# Altium PCB MATX.pcbdoc
Units mm, origin at the board's own origin, x right, y up, seen from the top; angles counter-clockwise.
Board outline 243.84 x 243.84 mm, 2 copper layers (Top Layer, Bottom Layer), stack 1.58 mm thick; 4 components, 0 nets, 674 pads, 0 vias.
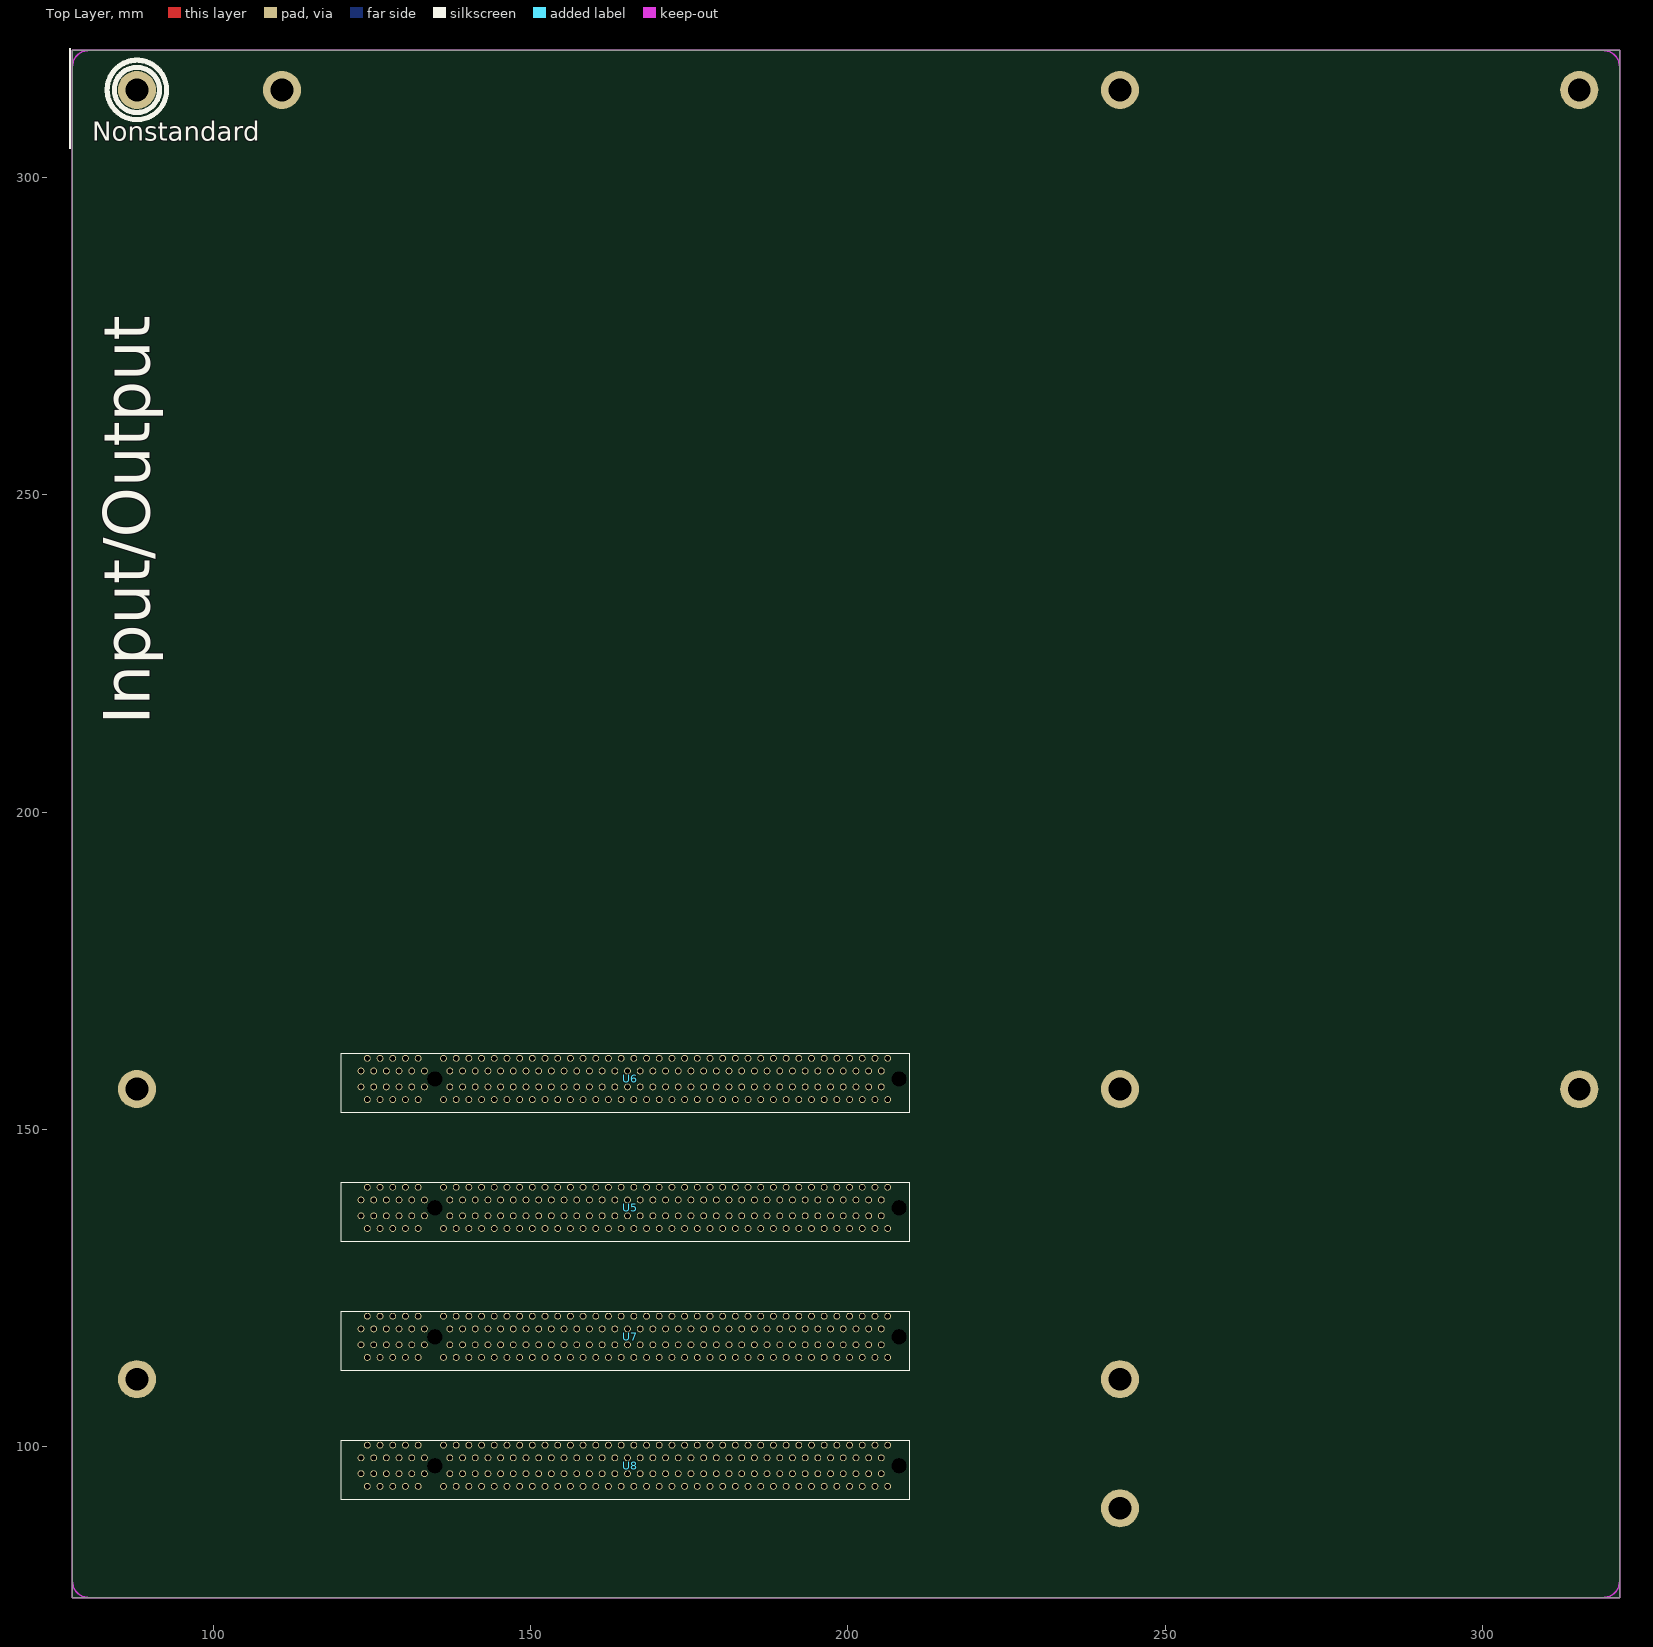
[diagram p0: Top Layer view]
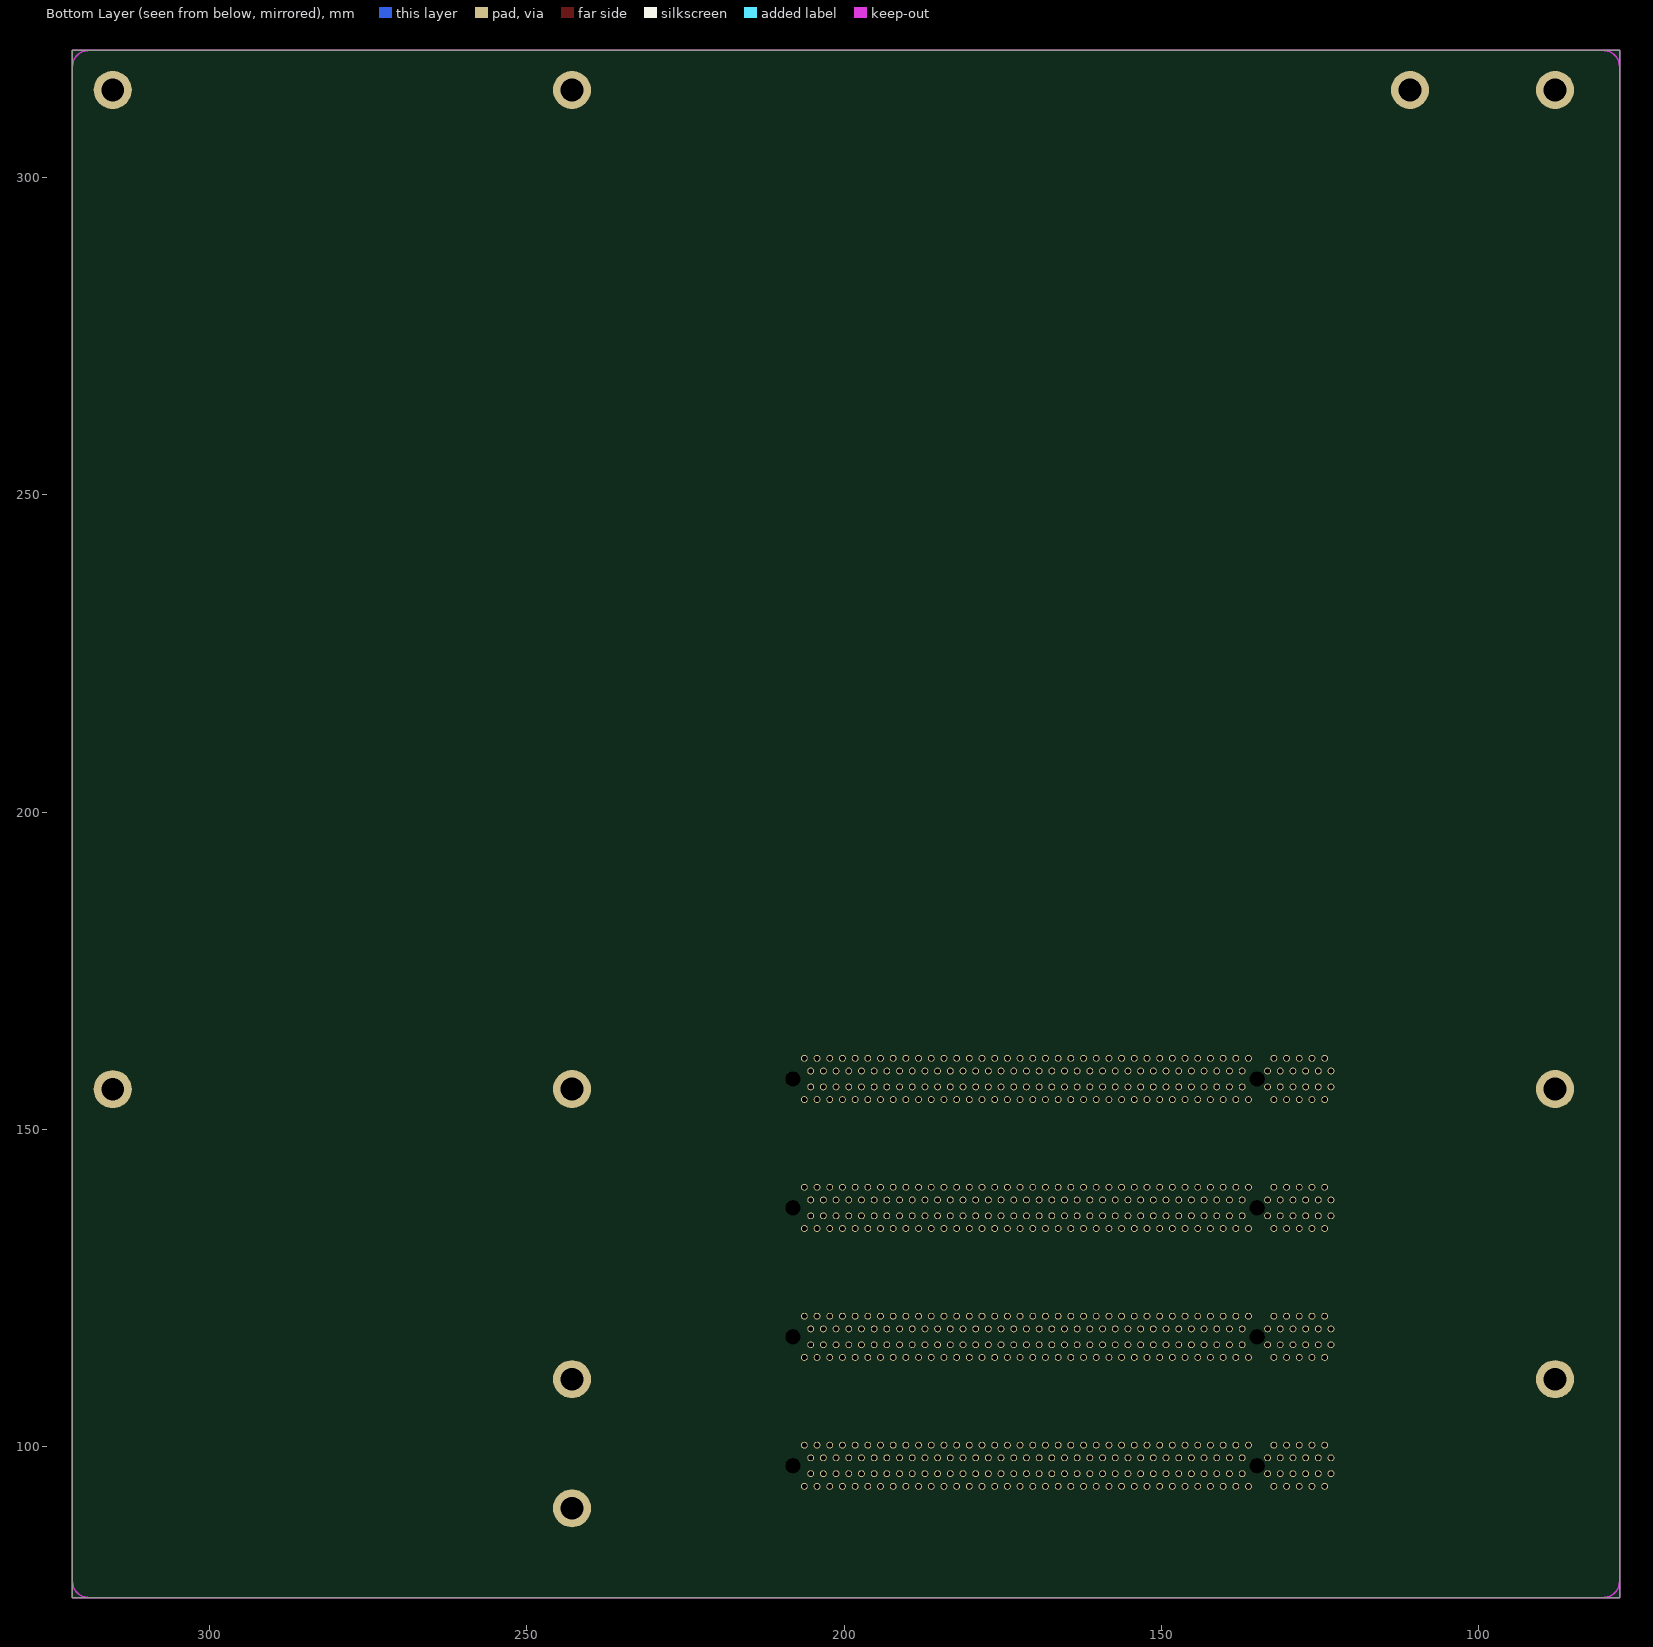
[diagram p1: Bottom Layer view, seen from below]

## Layer stack, top to bottom
Top Solder Mask Layer: solder mask 0.0102, Dk 3.3
Top Layer: signal copper 0.0356
Dielectric1: surface 1.5088, FR4, Dk 4.5
Bottom Layer: signal copper 0.0356
Bottom Solder Mask Layer: solder mask 0.0102, Dk 3.3

## Board outline
77.782,320.04 77.782,76.2 321.622,76.2 321.622,320.04

## Design rules (kind name [scope] priority, off if disabled: settings)
BoardOutlineClearance copperThickness1oz [All] p0: genericclearance=0.254 ignorepadtopadclearanceinfootprint=FALSE except(0: Arc-SplitContinuation Track-SplitContinuation SMDPad-SplitContinuation THPad-SplitContinuation Via-SplitContinuation Fill-SplitContinuation Poly-SplitContinuation Region-SplitContinuation Text-SplitContinuation)
BoardOutlineClearance copperThickness2oz [All] p0: genericclearance=0.254 ignorepadtopadclearanceinfootprint=FALSE except(0: Arc-SplitContinuation Track-SplitContinuation SMDPad-SplitContinuation THPad-SplitContinuation Via-SplitContinuation Fill-SplitContinuation Poly-SplitContinuation Region-SplitContinuation Text-SplitContinuation)
BoardOutlineClearance Plane_innerPlane [All] p0: genericclearance=0.254 ignorepadtopadclearanceinfootprint=FALSE except(0: Arc-SplitContinuation Track-SplitContinuation SMDPad-SplitContinuation THPad-SplitContinuation Via-SplitContinuation Fill-SplitContinuation Poly-SplitContinuation Region-SplitContinuation Text-SplitContinuation)
BoardOutlineClearance Copper_copperRegion [All] p0: genericclearance=0.254 ignorepadtopadclearanceinfootprint=FALSE except(0: Arc-SplitContinuation Track-SplitContinuation SMDPad-SplitContinuation THPad-SplitContinuation Via-SplitContinuation Fill-SplitContinuation Poly-SplitContinuation Region-SplitContinuation Text-SplitContinuation)
BoardOutlineClearance otherClearance [All] p0: genericclearance=0.254 ignorepadtopadclearanceinfootprint=FALSE except(0: Arc-SplitContinuation Track-SplitContinuation SMDPad-SplitContinuation THPad-SplitContinuation Via-SplitContinuation Fill-SplitContinuation Poly-SplitContinuation Region-SplitContinuation Text-SplitContinuation)
Clearance copperThickness1oz [All] p1: gap=0.178 ignorepadtopadclearanceinfootprint=FALSE
Clearance copperThickness2oz [All] p1: gap=0.178 ignorepadtopadclearanceinfootprint=FALSE
Clearance Plane_innerPlane [All] p1: gap=0.178 ignorepadtopadclearanceinfootprint=FALSE
Clearance Copper_copperRegion [All] p1: gap=0.178 ignorepadtopadclearanceinfootprint=FALSE
Clearance otherClearance [All] p1: gap=0.178 ignorepadtopadclearanceinfootprint=FALSE
DiffPairsRouting differentialPair [All] p1: maxuncoupledlength=10 minlimit=6 maxlimit=Infinity mostfreqgap=6 toplayer_minwidth=5 toplayer_prefwidth=10 toplayer_maxwidth=100 bottomlayer_minwidth=5 bottomlayer_prefwidth=10 bottomlayer_maxwidth=100
PasteMaskExpansion pasteMaskExpansion [All] p1: expansion=0
PlaneConnect innerPlane [All] p1: planeconnectstyle=Relief reliefexpansion=0.508 reliefentries=4 reliefconductorwidth=0.254 reliefairgap=0.254
PolygonConnect copperRegion [All] p1: connectstyle=Relief reliefentries=4 reliefconductorwidth=10 polygonreliefangle="90 Angle" airgapwidth=10
RoutingVias viaSize [All] p1: viastyle="Through Hole" holewidth=12.0078 minholewidth=11.811 maxholewidth=248.0314 width=12.0078 minwidth=11.811 maxwidth=248.0314
SolderMaskExpansion solderMaskExpansion [IsVia] p1: useseparateexpansions=TRUE expansion=-1000 expansionbottom=-1000
SolderMaskExpansion solderMaskExpansion [All] p2: useseparateexpansions=TRUE expansion=2 expansionbottom=2
Width copperThickness1oz [All] p1: maxlimit=100 minlimit=5 preferedwidth=10
Width copperThickness2oz [All] p1: maxlimit=100 minlimit=8 preferedwidth=10

## Components (designator, comment, footprint, x,y, rotation, side; value= is the part's Value field where it differs from the comment)
U5 "PCIEX16_SOLT COPY" "PCIEX16_SOLT COPY"#1 157.208,134.236 r0 top
U6 "PCIEX16_SOLT COPY" "PCIEX16_SOLT COPY"#2 157.208,154.556 r0 top
U7 "PCIEX16_SOLT COPY" "PCIEX16_SOLT COPY"#1 157.208,113.916 r0 top
U8 "PCIEX16_SOLT COPY" "PCIEX16_SOLT COPY"#1 157.208,93.596 r0 top

## Footprints (in the part's own frame and the unit in brackets; to place one, negate y for a bottom-side part, rotate by r counter-clockwise, add the part's x,y. Pads: shape width x height; smd on the part's side, far side on the other; paste and mask are expansions set on the pad)
"PCIEX16_SOLT COPY"#1 [mil]
  round 42 hole 28 slot 28.2 at 0 deg paste+0 mask+4: A1(-1336.3,182.2) A2(-1297,261) A3(-1257.6,182.2) A4(-1218.2,261) A5(-1178.9,182.2) A6(-1139.5,261) A7(-1100.1,182.2) A8(-1060.8,261) A9(-1021.4,182.2) A10(-982,261) A11(-942.6,182.2) A12(-824.5,261) A13(-785.2,182.2) A14(-745.8,261) A15(-706.4,182.2) A16(-667.1,261) A17(-627.7,182.2) A18(-588.3,261) A19(-548.9,182.2) A20(-509.6,261) A21(-470.2,182.2) A22(-430.8,261) A23(-391.5,182.2) A24(-352.1,261) A25(-312.7,182.2) A26(-273.4,261) A27(-234,182.2) A28(-194.6,261) A29(-155.2,182.2) A30(-115.9,261) A31(-76.5,182.2) A32(-37.1,261) A33(2.2,182.2) A34(41.6,261) A35(81,182.2) A36(120.3,261) A37(159.7,182.2) A38(199.1,261) A39(238.5,182.2) A40(277.8,261) A41(317.2,182.2) A42(356.6,261) A43(395.9,182.2) A44(435.3,261) A45(474.7,182.2) A46(514,261) A47(553.4,182.2) A48(592.8,261) A49(632.2,182.2) A50(671.5,261) A51(710.9,182.2) A52(750.3,261) A53(789.6,182.2) A54(829,261) A55(868.4,182.2) A56(907.7,261) A57(947.1,182.2) A58(986.5,261) A59(1025.9,182.2) A60(1065.2,261) A61(1104.6,182.2) A62(1144,261) A63(1183.3,182.2) A64(1222.7,261) A65(1262.1,182.2) A66(1301.4,261) A67(1340.8,182.2) A68(1380.2,261) A69(1419.6,182.2) A70(1458.9,261) A71(1498.3,182.2) A72(1537.7,261) A73(1577,182.2) A74(1616.4,261) A75(1655.8,182.2) A76(1695.1,261) A77(1734.5,182.2) A78(1773.9,261) A79(1813.3,182.2) A80(1852.6,261) A81(1892,182.2) A82(1931.4,261) B1(-1336.3,83.8) B2(-1297,5.1) B3(-1257.6,83.8) B4(-1218.2,5.1) B5(-1178.9,83.8) B6(-1139.5,5.1) B7(-1100.1,83.8) B8(-1060.8,5.1) B9(-1021.4,83.8) B10(-982,5.1) B11(-942.6,83.8) B12(-824.5,5.1) B13(-785.2,83.8) B14(-745.8,5.1) B15(-706.4,83.8) B16(-667.1,5.1) B17(-627.7,83.8) B18(-588.3,5.1) B19(-548.9,83.8) B20(-509.6,5.1) B21(-470.2,83.8) B22(-430.8,5.1) B23(-391.5,83.8) B24(-352.1,5.1) B25(-312.7,83.8) B26(-273.4,5.1) B27(-234,83.8) B28(-194.6,5.1) B29(-155.2,83.8) B30(-115.9,5.1) B31(-76.5,83.8) B32(-37.1,5.1) B33(2.2,83.8) B34(41.6,5.1) B35(81,83.8) B36(120.3,5.1) B37(159.7,83.8) B38(199.1,5.1) B39(238.5,83.8) B40(277.8,5.1) B41(317.2,83.8) B42(356.6,5.1) B43(395.9,83.8) B44(435.3,5.1) B45(474.7,83.8) B46(514,5.1) B47(553.4,83.8) B48(592.8,5.1) B49(632.2,83.8) B50(671.5,5.1) B51(710.9,83.8) B52(750.3,5.1) B53(789.6,83.8) B54(829,5.1) B55(868.4,83.8) B56(907.7,5.1) B57(947.1,83.8) B58(986.5,5.1) B59(1025.9,83.8) B60(1065.2,5.1) B61(1104.6,83.8) B62(1144,5.1) B63(1183.3,83.8) B64(1222.7,5.1) B65(1262.1,83.8) B66(1301.4,5.1) B67(1340.8,83.8) B68(1380.2,5.1) B69(1419.6,83.8) B70(1458.9,5.1) B71(1498.3,83.8) B72(1537.7,5.1) B73(1577,83.8) B74(1616.4,5.1) B75(1655.8,83.8) B76(1695.1,5.1) B77(1734.5,83.8) B78(1773.9,5.1) B79(1813.3,83.8) B80(1852.6,5.1) B81(1892,83.8) B82(1931.4,5.1)
  round 10 hole 93 slot 93.2 at 0 deg unplated paste+0 mask+4: NP1(-877.7,133) NP2(2002.2,133)
  silkscreen extent -1459,-78 2065,292
"PCIEX16_SOLT COPY"#2 [mil]
  round 42 hole 28 slot 28.2 at 0 deg paste+0 mask+4: A1(-1336.3,182.3) A2(-1297,261) A3(-1257.6,182.3) A4(-1218.2,261) A5(-1178.9,182.3) A6(-1139.5,261) A7(-1100.1,182.3) A8(-1060.8,261) A9(-1021.4,182.3) A10(-982,261) A11(-942.6,182.3) A12(-824.5,261) A13(-785.2,182.3) A14(-745.8,261) A15(-706.4,182.3) A16(-667.1,261) A17(-627.7,182.3) A18(-588.3,261) A19(-548.9,182.3) A20(-509.6,261) A21(-470.2,182.3) A22(-430.8,261) A23(-391.5,182.3) A24(-352.1,261) A25(-312.7,182.3) A26(-273.4,261) A27(-234,182.3) A28(-194.6,261) A29(-155.2,182.3) A30(-115.9,261) A31(-76.5,182.3) A32(-37.1,261) A33(2.2,182.3) A34(41.6,261) A35(81,182.3) A36(120.3,261) A37(159.7,182.3) A38(199.1,261) A39(238.5,182.3) A40(277.8,261) A41(317.2,182.3) A42(356.6,261) A43(395.9,182.3) A44(435.3,261) A45(474.7,182.3) A46(514,261) A47(553.4,182.3) A48(592.8,261) A49(632.2,182.3) A50(671.5,261) A51(710.9,182.3) A52(750.3,261) A53(789.6,182.3) A54(829,261) A55(868.4,182.3) A56(907.7,261) A57(947.1,182.3) A58(986.5,261) A59(1025.9,182.3) A60(1065.2,261) A61(1104.6,182.3) A62(1144,261) A63(1183.3,182.3) A64(1222.7,261) A65(1262.1,182.3) A66(1301.4,261) A67(1340.8,182.3) A68(1380.2,261) A69(1419.6,182.3) A70(1458.9,261) A71(1498.3,182.3) A72(1537.7,261) A73(1577,182.3) A74(1616.4,261) A75(1655.8,182.3) A76(1695.1,261) A77(1734.5,182.3) A78(1773.9,261) A79(1813.3,182.3) A80(1852.6,261) A81(1892,182.3) A82(1931.4,261) B1(-1336.3,83.8) B2(-1297,5.1) B3(-1257.6,83.8) B4(-1218.2,5.1) B5(-1178.9,83.8) B6(-1139.5,5.1) B7(-1100.1,83.8) B8(-1060.8,5.1) B9(-1021.4,83.8) B10(-982,5.1) B11(-942.6,83.8) B12(-824.5,5.1) B13(-785.2,83.8) B14(-745.8,5.1) B15(-706.4,83.8) B16(-667.1,5.1) B17(-627.7,83.8) B18(-588.3,5.1) B19(-548.9,83.8) B20(-509.6,5.1) B21(-470.2,83.8) B22(-430.8,5.1) B23(-391.5,83.8) B24(-352.1,5.1) B25(-312.7,83.8) B26(-273.4,5.1) B27(-234,83.8) B28(-194.6,5.1) B29(-155.2,83.8) B30(-115.9,5.1) B31(-76.5,83.8) B32(-37.1,5.1) B33(2.2,83.8) B34(41.6,5.1) B35(81,83.8) B36(120.3,5.1) B37(159.7,83.8) B38(199.1,5.1) B39(238.5,83.8) B40(277.8,5.1) B41(317.2,83.8) B42(356.6,5.1) B43(395.9,83.8) B44(435.3,5.1) B45(474.7,83.8) B46(514,5.1) B47(553.4,83.8) B48(592.8,5.1) B49(632.2,83.8) B50(671.5,5.1) B51(710.9,83.8) B52(750.3,5.1) B53(789.6,83.8) B54(829,5.1) B55(868.4,83.8) B56(907.7,5.1) B57(947.1,83.8) B58(986.5,5.1) B59(1025.9,83.8) B60(1065.2,5.1) B61(1104.6,83.8) B62(1144,5.1) B63(1183.3,83.8) B64(1222.7,5.1) B65(1262.1,83.8) B66(1301.4,5.1) B67(1340.8,83.8) B68(1380.2,5.1) B69(1419.6,83.8) B70(1458.9,5.1) B71(1498.3,83.8) B72(1537.7,5.1) B73(1577,83.8) B74(1616.4,5.1) B75(1655.8,83.8) B76(1695.1,5.1) B77(1734.5,83.8) B78(1773.9,5.1) B79(1813.3,83.8) B80(1852.6,5.1) B81(1892,83.8) B82(1931.4,5.1)
  round 10 hole 93 slot 93.2 at 0 deg unplated paste+0 mask+4: NP1(-877.7,133) NP2(2002.2,133)
  silkscreen extent -1459,-78 2065,292

## Free pads (board coordinates)
  round 5.999 hole 3.599 paste+0 mask+0.051: 89(87.942,110.617) 89(87.942,156.337) 89(87.942,313.817) 89(110.802,313.817) 89(242.882,90.269) 89(242.882,110.617) 89(242.882,156.337) 89(242.882,313.817) 89(315.272,156.327) 89(315.272,313.817)

## Nets (pads, with @x,y where several pads share a name; then routed paths per layer and width w, separated by ;. In a path a pad name is that pad's centre, name@x,y a point inside that pad or via, vN(x,y) a via of type N, cw(c..) or ccw(c..) an arc to the next point about the centre after c; other vN are vias at no path point)
pads on no net: U5.A1 U5.A2 U5.A3 U5.A4 U5.A5 U5.A6 U5.A7 U5.A8 U5.A9 U5.A10 U5.A11 U5.A12 U5.A13 U5.A14 U5.A15 U5.A16 U5.A17 U5.A18 U5.A19 U5.A20 U5.A21 U5.A22 U5.A23 U5.A24 U5.A25 U5.A26 U5.A27 U5.A28 U5.A29 U5.A30 U5.A31 U5.A32 U5.A33 U5.A34 U5.A35 U5.A36 U5.A37 U5.A38 U5.A39 U5.A40 U5.A41 U5.A42 U5.A43 U5.A44 U5.A45 U5.A46 U5.A47 U5.A48 U5.A49 U5.A50 U5.A51 U5.A52 U5.A53 U5.A54 U5.A55 U5.A56 U5.A57 U5.A58 U5.A59 U5.A60 U5.A61 U5.A62 U5.A63 U5.A64 U5.A65 U5.A66 U5.A67 U5.A68 U5.A69 U5.A70 U5.A71 U5.A72 U5.A73 U5.A74 U5.A75 U5.A76 U5.A77 U5.A78 U5.A79 U5.A80 U5.A81 U5.A82 U5.B1 U5.B2 U5.B3 U5.B4 U5.B5 U5.B6 U5.B7 U5.B8 U5.B9 U5.B10 U5.B11 U5.B12 U5.B13 U5.B14 U5.B15 U5.B16 U5.B17 U5.B18 U5.B19 U5.B20 U5.B21 U5.B22 U5.B23 U5.B24 U5.B25 U5.B26 U5.B27 U5.B28 U5.B29 U5.B30 U5.B31 U5.B32 U5.B33 U5.B34 U5.B35 U5.B36 U5.B37 U5.B38 U5.B39 U5.B40 U5.B41 U5.B42 U5.B43 U5.B44 U5.B45 U5.B46 U5.B47 U5.B48 U5.B49 U5.B50 U5.B51 U5.B52 U5.B53 U5.B54 U5.B55 U5.B56 U5.B57 U5.B58 U5.B59 U5.B60 U5.B61 U5.B62 U5.B63 U5.B64 U5.B65 U5.B66 U5.B67 U5.B68 U5.B69 U5.B70 U5.B71 U5.B72 U5.B73 U5.B74 U5.B75 U5.B76 U5.B77 U5.B78 U5.B79 U5.B80 U5.B81 U5.B82 U5.NP1 U5.NP2 U6.A1 U6.A2 U6.A3 U6.A4 U6.A5 U6.A6 U6.A7 U6.A8 U6.A9 U6.A10 U6.A11 U6.A12 U6.A13 U6.A14 U6.A15 U6.A16 U6.A17 U6.A18 U6.A19 U6.A20 U6.A21 U6.A22 U6.A23 U6.A24 U6.A25 U6.A26 U6.A27 U6.A28 U6.A29 U6.A30 U6.A31 U6.A32 U6.A33 U6.A34 U6.A35 U6.A36 U6.A37 U6.A38 U6.A39 U6.A40 U6.A41 U6.A42 U6.A43 U6.A44 U6.A45 U6.A46 U6.A47 U6.A48 U6.A49 U6.A50 U6.A51 U6.A52 U6.A53 U6.A54 U6.A55 U6.A56 U6.A57 U6.A58 U6.A59 U6.A60 U6.A61 U6.A62 U6.A63 U6.A64 U6.A65 U6.A66 U6.A67 U6.A68 U6.A69 U6.A70 U6.A71 U6.A72 U6.A73 U6.A74 U6.A75 U6.A76 U6.A77 U6.A78 U6.A79 U6.A80 U6.A81 U6.A82 U6.B1 U6.B2 U6.B3 U6.B4 U6.B5 U6.B6 U6.B7 U6.B8 U6.B9 U6.B10 U6.B11 U6.B12 U6.B13 U6.B14 U6.B15 U6.B16 U6.B17 U6.B18 U6.B19 U6.B20 U6.B21 U6.B22 U6.B23 U6.B24 U6.B25 U6.B26 U6.B27 U6.B28 U6.B29 U6.B30 U6.B31 U6.B32 U6.B33 U6.B34 U6.B35 U6.B36 U6.B37 U6.B38 U6.B39 U6.B40 U6.B41 U6.B42 U6.B43 U6.B44 U6.B45 U6.B46 U6.B47 U6.B48 U6.B49 U6.B50 U6.B51 U6.B52 U6.B53 U6.B54 U6.B55 U6.B56 U6.B57 U6.B58 U6.B59 U6.B60 U6.B61 U6.B62 U6.B63 U6.B64 U6.B65 U6.B66 U6.B67 U6.B68 U6.B69 U6.B70 U6.B71 U6.B72 U6.B73 U6.B74 U6.B75 U6.B76 U6.B77 U6.B78 U6.B79 U6.B80 U6.B81 U6.B82 U6.NP1 U6.NP2 U7.A1 U7.A2 U7.A3 U7.A4 U7.A5 U7.A6 U7.A7 U7.A8 U7.A9 U7.A10 U7.A11 U7.A12 U7.A13 U7.A14 U7.A15 U7.A16 U7.A17 U7.A18 U7.A19 U7.A20 U7.A21 U7.A22 U7.A23 U7.A24 U7.A25 U7.A26 U7.A27 U7.A28 U7.A29 U7.A30 U7.A31 U7.A32 U7.A33 U7.A34 U7.A35 U7.A36 U7.A37 U7.A38 U7.A39 U7.A40 U7.A41 U7.A42 U7.A43 U7.A44 U7.A45 U7.A46 U7.A47 U7.A48 U7.A49 U7.A50 U7.A51 U7.A52 U7.A53 U7.A54 U7.A55 U7.A56 U7.A57 U7.A58 U7.A59 U7.A60 U7.A61 U7.A62 U7.A63 U7.A64 U7.A65 U7.A66 U7.A67 U7.A68 U7.A69 U7.A70 U7.A71 U7.A72 U7.A73 U7.A74 U7.A75 U7.A76 U7.A77 U7.A78 U7.A79 U7.A80 U7.A81 U7.A82 U7.B1 U7.B2 U7.B3 U7.B4 U7.B5 U7.B6 U7.B7 U7.B8 U7.B9 U7.B10 U7.B11 U7.B12 U7.B13 U7.B14 U7.B15 U7.B16 U7.B17 U7.B18 U7.B19 U7.B20 U7.B21 U7.B22 U7.B23 U7.B24 U7.B25 U7.B26 U7.B27 U7.B28 U7.B29 U7.B30 U7.B31 U7.B32 U7.B33 U7.B34 U7.B35 U7.B36 U7.B37 U7.B38 U7.B39 U7.B40 U7.B41 U7.B42 U7.B43 U7.B44 U7.B45 U7.B46 U7.B47 U7.B48 U7.B49 U7.B50 U7.B51 U7.B52 U7.B53 U7.B54 U7.B55 U7.B56 U7.B57 U7.B58 U7.B59 U7.B60 U7.B61 U7.B62 U7.B63 U7.B64 U7.B65 U7.B66 U7.B67 U7.B68 U7.B69 U7.B70 U7.B71 U7.B72 U7.B73 U7.B74 U7.B75 U7.B76 U7.B77 U7.B78 U7.B79 U7.B80 U7.B81 U7.B82 U7.NP1 U7.NP2 U8.A1 U8.A2 U8.A3 U8.A4 U8.A5 U8.A6 U8.A7 U8.A8 U8.A9 U8.A10 U8.A11 U8.A12 U8.A13 U8.A14 U8.A15 U8.A16 U8.A17 U8.A18 U8.A19 U8.A20 U8.A21 U8.A22 U8.A23 U8.A24 U8.A25 U8.A26 U8.A27 U8.A28 U8.A29 U8.A30 U8.A31 U8.A32 U8.A33 U8.A34 U8.A35 U8.A36 U8.A37 U8.A38 U8.A39 U8.A40 U8.A41 U8.A42 U8.A43 U8.A44 U8.A45 U8.A46 U8.A47 U8.A48 U8.A49 U8.A50 U8.A51 U8.A52 U8.A53 U8.A54 U8.A55 U8.A56 U8.A57 U8.A58 U8.A59 U8.A60 U8.A61 U8.A62 U8.A63 U8.A64 U8.A65 U8.A66 U8.A67 U8.A68 U8.A69 U8.A70 U8.A71 U8.A72 U8.A73 U8.A74 U8.A75 U8.A76 U8.A77 U8.A78 U8.A79 U8.A80 U8.A81 U8.A82 U8.B1 U8.B2 U8.B3 U8.B4 U8.B5 U8.B6 U8.B7 U8.B8 U8.B9 U8.B10 U8.B11 U8.B12 U8.B13 U8.B14 U8.B15 U8.B16 U8.B17 U8.B18 U8.B19 U8.B20 U8.B21 U8.B22 U8.B23 U8.B24 U8.B25 U8.B26 U8.B27 U8.B28 U8.B29 U8.B30 U8.B31 U8.B32 U8.B33 U8.B34 U8.B35 U8.B36 U8.B37 U8.B38 U8.B39 U8.B40 U8.B41 U8.B42 U8.B43 U8.B44 U8.B45 U8.B46 U8.B47 U8.B48 U8.B49 U8.B50 U8.B51 U8.B52 U8.B53 U8.B54 U8.B55 U8.B56 U8.B57 U8.B58 U8.B59 U8.B60 U8.B61 U8.B62 U8.B63 U8.B64 U8.B65 U8.B66 U8.B67 U8.B68 U8.B69 U8.B70 U8.B71 U8.B72 U8.B73 U8.B74 U8.B75 U8.B76 U8.B77 U8.B78 U8.B79 U8.B80 U8.B81 U8.B82 U8.NP1 U8.NP2

## Keep-outs
Board Outline Layer:
  lines w0.254: 77.782,78.793 77.793,78.567 77.823,78.344 77.871,78.123 77.94,77.907 78.026,77.699 78.13,77.498 78.252,77.307 78.389,77.127 78.544,76.959 78.71,76.807 78.89,76.67 79.08,76.548 79.281,76.444 79.489,76.357 79.705,76.289 79.926,76.241 80.152,76.21 80.378,76.2 ; 77.782,317.447 77.793,317.673 77.823,317.896 77.871,318.117 77.94,318.333 78.026,318.541 78.13,318.742 78.252,318.933 78.389,319.113 78.542,319.281 78.71,319.433 78.89,319.57 79.08,319.692 79.281,319.796 79.489,319.883 79.705,319.951 79.926,319.999 80.15,320.03 80.376,320.04 ; 319.029,76.2 319.255,76.21 319.479,76.241 319.7,76.289 319.916,76.357 320.126,76.444 320.327,76.548 320.518,76.67 320.695,76.807 320.863,76.959 321.015,77.127 321.155,77.307 321.274,77.498 321.381,77.699 321.467,77.907 321.534,78.123 321.584,78.344 321.612,78.567 321.622,78.793 ; 319.029,320.04 319.255,320.03 319.479,319.999 319.7,319.951 319.916,319.883 320.124,319.796 320.324,319.692 320.518,319.57 320.695,319.433 320.863,319.281 321.015,319.113 321.153,318.933 321.274,318.742 321.379,318.541 321.465,318.333 321.534,318.117 321.584,317.896 321.612,317.673 321.622,317.447 ; 77.782,76.2 77.782,320.04 321.622,320.04 321.622,76.2 77.782,76.2

## Silkscreen, mask and mechanical layers (free items; w line width, h text height)
Top Silkscreen Layer:
  drawing of 181 lines, arcs and shapes, not listed
  text "Nonstandard" at 80.932,305.768 h3
  text "Input/Output" at 89.946,213.744 h7.37 r90

## Dimensions
77.782,323.977 to 321.622,323.977 on Document Layer
76.342,320.053 to 76.2,161.305 on Document Layer
325.559,320.04 to 325.559,76.2 on Document Layer